# EAGLE board Motor Control Sensor (EAGLE 9.7.0)

Size 248.59 x 139.54 mm. Coordinates in mm from the lower left corner, seen from the top.
Outline: 0,0 248.59,0 248.59,139.54 0,139.54 0,0
Copper layers (1*16): Top 0.035mm / dielectric 1.5mm / Bottom 0.035mm
Design rules "default": minimum track width 6mil, minimum drill 0.35mm, track to track 6mil, track to pad 6mil, pad to pad 6mil, via to via 6mil, smd to smd 6mil, copper to edge 40mil, drill to drill 6mil, minimum pad ring 10mil, minimum via ring 8mil, stop-mask expansion 4mil, vias tented up to drill 0mil, thermal gap 10mil

## Footprints (pad centres in the part's own frame; a part is rotated, then mirrored left to right if it is on the bottom)
LED-RGB-5MM = drill 0.9: B 0.635,0.635; C -0.635,-0.635; G 1.905,-0.635; R -1.905,0.635
LEDRD254W60D565H860B_G = drill 0.981 pad 1.581: 1 -1.27,0; 2 1.27,0
LEDRD254W60D565H860B_B = drill 0.981 pad 1.581: 1 -1.27,0; 2 1.27,0
1X08 = drill 1.016 long: 1 -8.89,0; 2 -6.35,0; 3 -3.81,0; 4 -1.27,0; 5 1.27,0; 6 3.81,0; 7 6.35,0; 8 8.89,0
MOTOR = drill 1.118 pad 3.15 octagon: + 2.54,0; - -2.54,0
RESAD1016W63L850D250B = drill 0.83 pad 1.43: 1 -5.08,0; 2 5.08,0
ARDUINO-UNO-R3-SHIELD = drill 1.016 pad 1.88: 3.3V 24.13,-2.54; 5V 24.13,0; A0 24.13,12.7; A1 24.13,15.24; A2 24.13,17.78; A3 24.13,20.32; A4 24.13,22.86; A5 24.13,25.4; AREF -24.13,-13.97; D2 -24.13,20.32; D3 -24.13,17.78; D4 -24.13,15.24; D5 -24.13,12.7; D6 -24.13,10.16; D7 -24.13,7.62; D8 -24.13,3.81; D9 -24.13,1.27; D10 -24.13,-1.27; D11 -24.13,-3.81; D12 -24.13,-6.35; D13 -24.13,-8.89; GND@0 24.13,2.54; GND@1 24.13,5.08; GND@2 -24.13,-11.43; IOREF 24.13,-7.62; NC 24.13,-10.16; RES 24.13,-5.08; RX -24.13,25.4; SCL -24.13,-19.05; SDA -24.13,-16.51; TX -24.13,22.86; VIN 24.13,7.62
LCD-I2C = drill 1.016 long: 1 -19.05,-5.08; 2 -19.05,-7.62; 3 -19.05,-10.16; 4 -19.05,-12.7
TO92 = drill 0.813 octagon: 1 -1.27,0; 2 0,1.905; 3 1.27,0
DIP762W53P254L1969H508Q16B = drill 0.743 pad 1.343: 1 -3.81,8.89; 2 -3.81,6.35; 3 -3.81,3.81; 4 -3.81,1.27; 5 -3.81,-1.27; 6 -3.81,-3.81; 7 -3.81,-6.35; 8 -3.81,-8.89; 9 3.81,-8.89; 10 3.81,-6.35; 11 3.81,-3.81; 12 3.81,-1.27; 13 3.81,1.27; 14 3.81,3.81; 15 3.81,6.35; 16 3.81,8.89

## Placement (x,y rotation side)
D1  LED-RGBRCBG-PTH  [LED-RGB-5MM]  19.8,107.93 0 top
D2  GREEN  [LEDRD254W60D565H860B_G]  29.96,107.93 180 top
D3  BLUE  [LEDRD254W60D565H860B_B]  37.58,107.93 180 top
KEYPAD1  KEYPAD-4X4  [1X08]  139.43,68.76 0 top
M1  MOTOR_HDR  [MOTOR]  60.72,131.28 0 top
R1  220  [RESAD1016W63L850D250B]  15.99,100.31 90 top
R2  220  [RESAD1016W63L850D250B]  21.07,100.31 90 top
R3  220  [RESAD1016W63L850D250B]  23.61,100.31 90 top
R4  220  [RESAD1016W63L850D250B]  28.69,100.31 90 top
R5  220  [RESAD1016W63L850D250B]  36.31,100.31 90 top
U1  ARDUINO-UNO-R3-SHIELD  [ARDUINO-UNO-R3-SHIELD]  122.35,29.84 270 top
U2  LCD-16X2-I2CSUNFOUNDER-IIC  [LCD-I2C]  192.96,46.23 0 top
U3  TMP36GT9Z_TO92  [TO92]  5.83,107.93 0 top
U4  L293E  [DIP762W53P254L1969H508Q16B]  60.44,101.58 90 top

## Library data of the parts
D1 KEYPAD1 M1 R1-R5 U1-U4 = Tinkercad
D2 = Tinkercad; CATEGORY: Opto-Electronic; SUB-CATEGORY: LED; VALUE: LED_GREEN
D3 = Tinkercad; CATEGORY: Opto-Electronic; SUB-CATEGORY: LED; VALUE: LED_BLUE

## Nets
D1_B: D1.B R2.2
D1_G: D1.G R3.2
D1_R: D1.R R1.2
D2_C: D2.2 R4.2
D3_C: D3.2 R5.2
M1_+: M1.+ U4.11
M1_-: M1.- U4.14
U1_5V: U1.5V U2.2 U3.3 U4.1 U4.6 U4.7 U4.8 U4.10 U4.16
U1_A0: U1.A0 U3.2
U1_D2: KEYPAD1.6 U1.D2
U1_D3: KEYPAD1.5 U1.D3
U1_D4: KEYPAD1.4 U1.D4
U1_D5: KEYPAD1.3 U1.D5
U1_D6: KEYPAD1.2 U1.D6
U1_D7: KEYPAD1.1 U1.D7
U1_D8: D3.1 U1.D8
U1_D9: U1.D9 U4.9
U1_D10: D2.1 U1.D10
U1_D11: R3.1 U1.D11
U1_D12: R2.1 U1.D12
U1_D13: R1.1 U1.D13
U1_GND: D1.C R4.1 R5.1 U1.GND@0 U1.GND@1 U1.GND@2 U2.1 U3.1 U4.2 U4.3 U4.4 U4.5 U4.12 U4.13 U4.15
U1_RX: KEYPAD1.8 U1.RX
U1_SCL: U1.SCL U2.4
U1_SDA: U1.SDA U2.3
U1_TX: KEYPAD1.7 U1.TX

## Tracks (layer width: path | path; a pad name or v marks a point on that pad's centre or on a via)
D1_B  (1 unrouted)
D1_G  (1 unrouted)
D1_R  (1 unrouted)
D2_C  (1 unrouted)
D3_C  (1 unrouted)
M1_+  (1 unrouted)
M1_-  (1 unrouted)
U1_5V  (8 unrouted)
U1_A0  (1 unrouted)
U1_D2  (1 unrouted)
U1_D3  (1 unrouted)
U1_D4  (1 unrouted)
U1_D5  (1 unrouted)
U1_D6  (1 unrouted)
U1_D7  (1 unrouted)
U1_D8  (1 unrouted)
U1_D9  (1 unrouted)
U1_D10  (1 unrouted)
U1_D11  (1 unrouted)
U1_D12  (1 unrouted)
U1_D13  (1 unrouted)
U1_GND  (14 unrouted)
U1_RX  (1 unrouted)
U1_SCL  (1 unrouted)
U1_SDA  (1 unrouted)
U1_TX  (1 unrouted)